# Altium PCB Misc.PcbDoc
Units mm, origin at the board's own origin, x right, y up, seen from the top; angles counter-clockwise.
Board outline 33.15 x 33.15 mm, 2 copper layers (Top Layer, Bottom Layer); 16 components, 23 nets, 95 pads, 0 vias.
Unrouted connection lines stored in the file: 31.
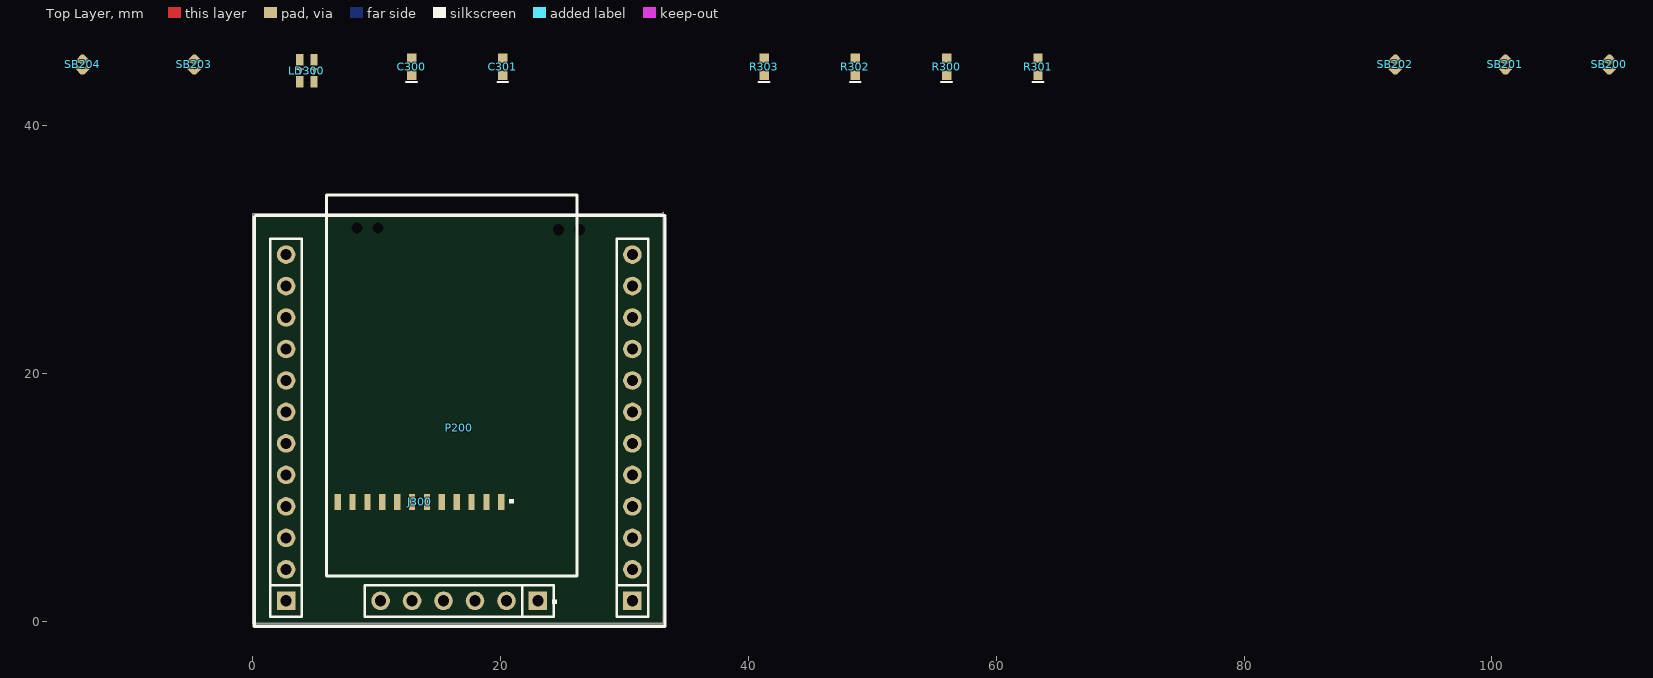
[diagram p0: Top Layer view]
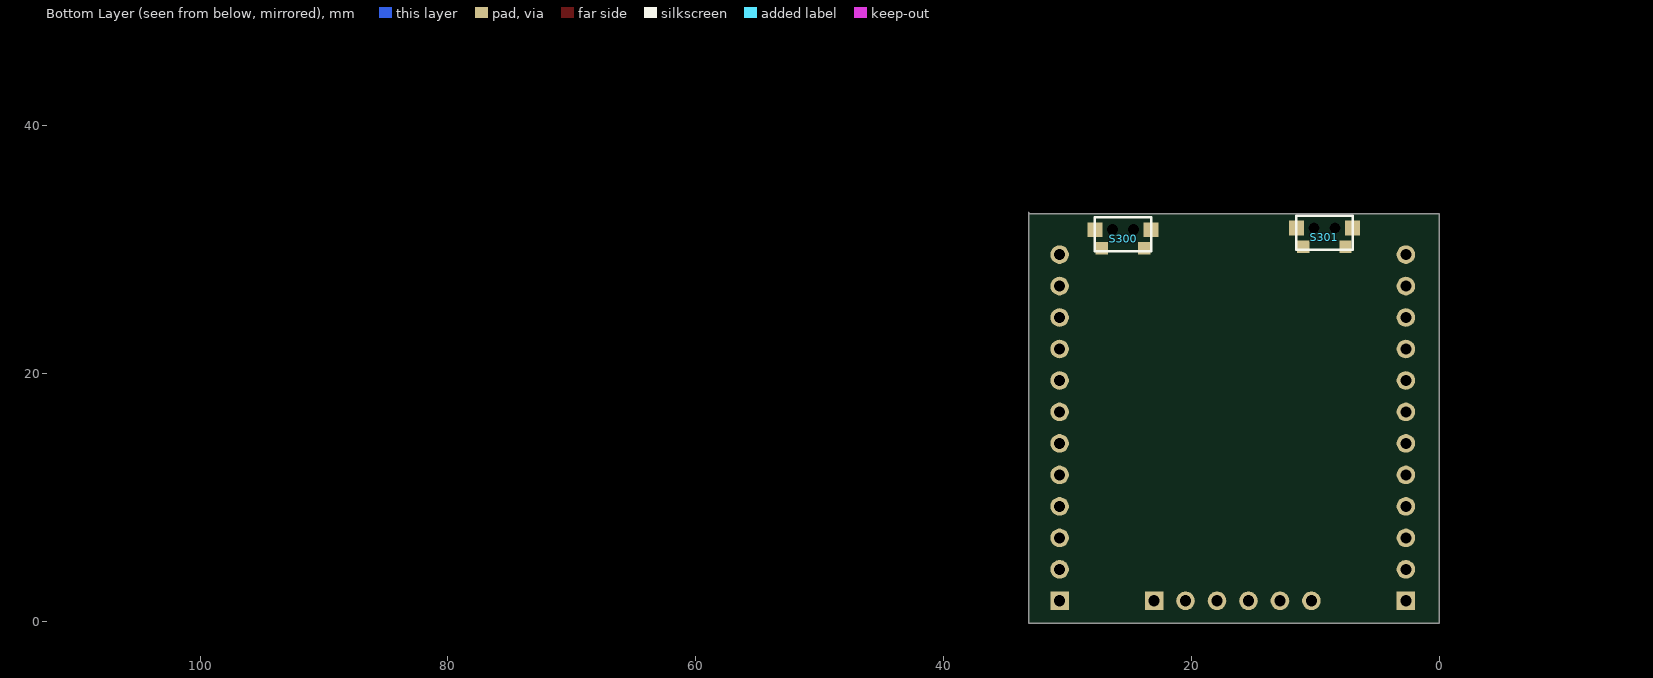
[diagram p1: Bottom Layer view, seen from below]

## Layer stack, top to bottom
Top Solder: solder mask 0.0102, Solder Resist, Dk 3.5
Top Layer: signal copper 0.0356
Dielectric 1: dielectric 0.32, FR-4, Dk 4.8
Bottom Layer: signal copper 0.0356
Bottom Solder: solder mask 0.0102, Solder Resist, Dk 3.5

## Board outline
0,-0.127 0,32.893 33.02,32.893 33.147,33.02 33.147,-0.127

## Design rules (kind name [scope] priority, off if disabled: settings)
Clearance [All] p1: gap=0.254
PolygonConnect [All] p1: connectstyle=Relief reliefconductorwidth=0.254 reliefentries=4 polygonreliefangle="90 Angle" airgapwidth=0.254
RoomDefinition Misc [InComponentClass('Misc')] p1: confinementstyle=ConfineIn formatcopy=TRUE lockcomponents=FALSE outline -0.254,-0.635 33.528,-0.635 33.528,33.147 -0.254,33.147
RoutingVias [All] p1: holewidth=0.711 width=1.27 viastyle="Through Hole" minholewidth=0.711 minwidth=1.27 maxholewidth=0.711 maxwidth=1.27
SolderMaskExpansion [All] p1: expansion=0.102
Width [All] p1: maxlimit=0.254 minlimit=0.254 preferedwidth=0.254
29 further rules are at their usual default settings.

## Components (designator, comment, footprint, x,y, rotation, side; value= is the part's Value field where it differs from the comment)
C300 "100nF" 0603M 12.827,44.069 r90 top
C301 "100nF" 0603M 20.193,44.069 r90 top
J300 "TFT-96x64" TFT-PIN12-0.5 13.335,5.207 r0 top
LD300 "LTST-C195KGJRKT" 0805-LED-Bi 4.318,43.434 r90 top
P200 "Synio-Full" Synio-Full 0.127,-0.381 r0 top
R300 "100K" 0603M 56.007,44.069 r90 top
R301 "100K" 0603M 63.373,44.069 r90 top
R302 "1K" 0603M 48.641,44.069 r90 top
R303 "10K" 0603M 41.275,44.069 r90 top
S300 "RESET" KEY-2x4-SMD 25.527,31.623 r180 bottom
S301 "RESET" KEY-2x4-SMD 9.271,31.75 r180 bottom
SB200 "Circuit Breaker" JP2_SMD 109.474,44.958 r90 top
SB201 "Circuit Breaker" JP2_SMD 101.092,44.958 r90 top
SB202 "Circuit Breaker" JP2_SMD 92.202,44.958 r90 top
SB203 "Circuit Breaker" JP2_SMD -4.699,44.958 r90 top
SB204 "Circuit Breaker" JP2_SMD -13.716,44.958 r90 top

## Footprints (in the part's own frame and the unit in brackets; to place one, negate y for a bottom-side part, rotate by r counter-clockwise, add the part's x,y. Pads: shape width x height; smd on the part's side, far side on the other; paste and mask are expansions set on the pad)
0603M [mil]
  rect 30x30 smd: 1(0,0) 2(55,0)
  silkscreen extent -21,-17 -21,18, body extent -5,-15 60,15, height 43
0805-LED-Bi [mm]
  rect 0.9x0.6 smd: 1(0.127,-0.635) 2(0.127,0.508) 3(1.905,0.508) 4(1.905,-0.635)
  silkscreen extent 0.76,-0.89 1.14,0.76, body extent 0.32,-1.02 1.72,0.9, height 1.1
JP2_SMD [mil]
  oct 15x30 smd rot 45: 1(-18,-8) 2(18,7)
  oct 15.75x30 smd rot 135: 1(-18,8)
  rect 26x26 smd rot 45: 2(13,0)
  oct 15x30 smd rot 135: 2(18,-7)
KEY-2x4-SMD [mm] "6.8MM,2.8MM,SMD"
  rect 1.2x1.2 smd: 0(-2.25,0) 0(2.25,0)
  rect 1x1 smd: 1(-1.7,-1.5) 2(1.7,-1.5)
  round 0.8 hole 0.9 unplated: MH1(0.85,0) MH2(-0.85,0)
  silkscreen extent -2.29,-1.73 2.29,1.02, body extent -2.28,-1.6 2.29,0.94, height 1.1
Synio-Full [mm]
  round 1.5 hole 0.9: 1(2.575,29.997) 2(2.575,27.457) 3(2.575,24.917) 4(2.575,22.377) 5(2.575,19.837) 6(2.575,17.297) 7(2.575,14.757) 8(2.575,12.217) 9(2.575,9.677) 10(2.575,7.137) 11(2.575,4.597) 13(10.195,2.057) 14(12.735,2.057) 15(15.275,2.057) 16(17.815,2.057) 17(20.355,2.057) 20(30.515,4.597) 21(30.515,7.137) 22(30.515,9.677) 23(30.515,12.217) 24(30.515,14.757) 25(30.515,17.297) 26(30.515,19.837) 27(30.515,22.377) 28(30.515,24.917) 29(30.515,27.457) 30(30.515,29.997)
  rect 1.5x1.5 hole 0.9: 12(2.575,2.057) 18(22.895,2.057) 19(30.515,2.057)
  silkscreen extent 0,0 33.15,33.15, body extent 1.13,0.64 31.99,31.25, height 8.51
TFT-PIN12-0.5 [mm]
  rect 0.5x1.3 smd: 1(6.731,4.445) 2(5.531,4.445) 3(4.331,4.445) 4(3.131,4.445) 5(1.931,4.445) 6(0.731,4.445) 7(-0.469,4.445) 8(-1.669,4.445) 9(-2.869,4.445) 10(-4.069,4.445) 11(-5.269,4.445) 12(-6.469,4.445)
  silkscreen extent -7.37,-1.52 12.83,29.21

## Part data
C300 C301: library part CAP, "Capacitor"
LD300: "Avago, HSMF-A203 Bi-Color LED"
P200: "Synio-Full Header"
R300 R301: library part res1, "Resistor"
R302 R303: library part Res2, "Resistor"
S300 S301: library part SW-PB, "Switch"

## Nets (pads, with @x,y where several pads share a name; then routed paths per layer and width w, separated by ;. In a path a pad name is that pad's centre, name@x,y a point inside that pad or via, vN(x,y) a via of type N, cw(c..) or ccw(c..) an arc to the next point about the centre after c; other vN are vias at no path point)
CE: SB203.2 SB204.2
CSN: P200.11
D3V3: P200.18 R300.2 R301.2 R302.1
DC: J300.4
GND: C300.1 C301.1 J300.8 J300.10 J300.11 P200.12 P200.17 P200.19 S300.1 S301.1
KEY0: C300.2 R300.1 S300.2
KEY1: C301.2 R301.1 S301.2
MISO: P200.9
MOSI: J300.3 P200.8
NCS: J300.5
NetJ300_9: J300.9 R303.1
NetLD300_3: LD300.3 LD300.4 R302.2
NetP200_1: P200.1 SB200.1
NetP200_2: P200.2 SB201.1
NetP200_3: P200.3 SB202.1
NetP200_20: P200.20 SB204.1
NetP200_21: P200.21 SB203.1
NetSB200_2: SB200.2 SB201.2 SB202.2
NRST: P200.14
RXD: LD300.1
SCK: J300.6 P200.10
TXD: LD300.2
VDD: J300.1 J300.2 R303.2
pads on no net: J300.7 J300.12 P200.4 P200.5 P200.6 P200.7 P200.13 P200.15 P200.16 P200.22 P200.23 P200.24 P200.25 P200.26 P200.27 P200.28 P200.29 P200.30 S300.0 S300.MH1 S300.MH2 S301.0 S301.MH1 S301.MH2